# EAGLE board breakout (EAGLE 9.5.1), part 1 of 2
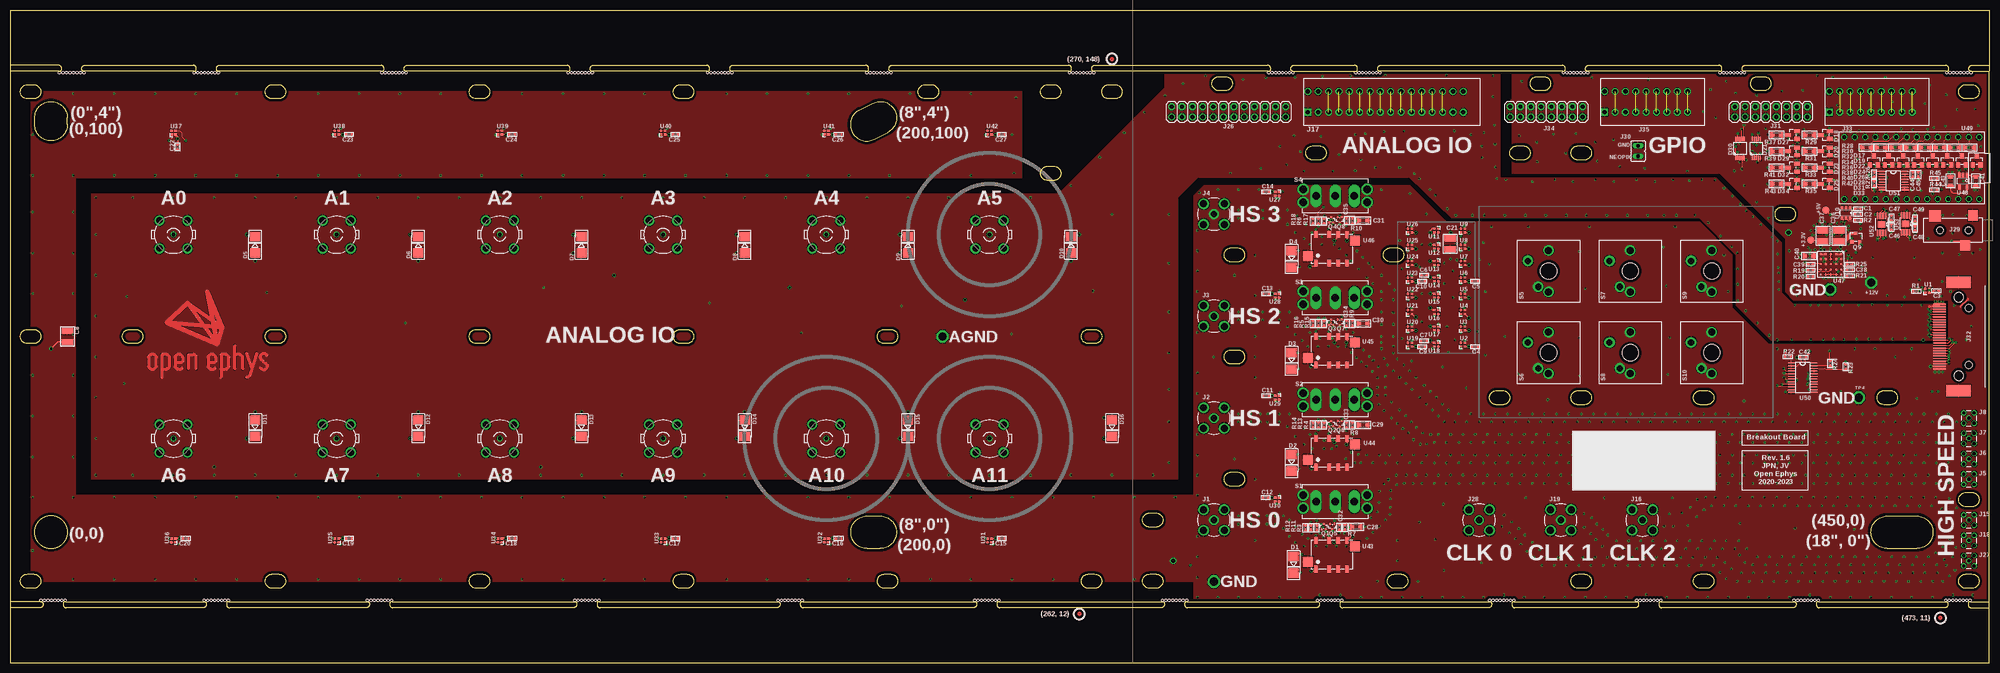
[diagram p0: board, top side]
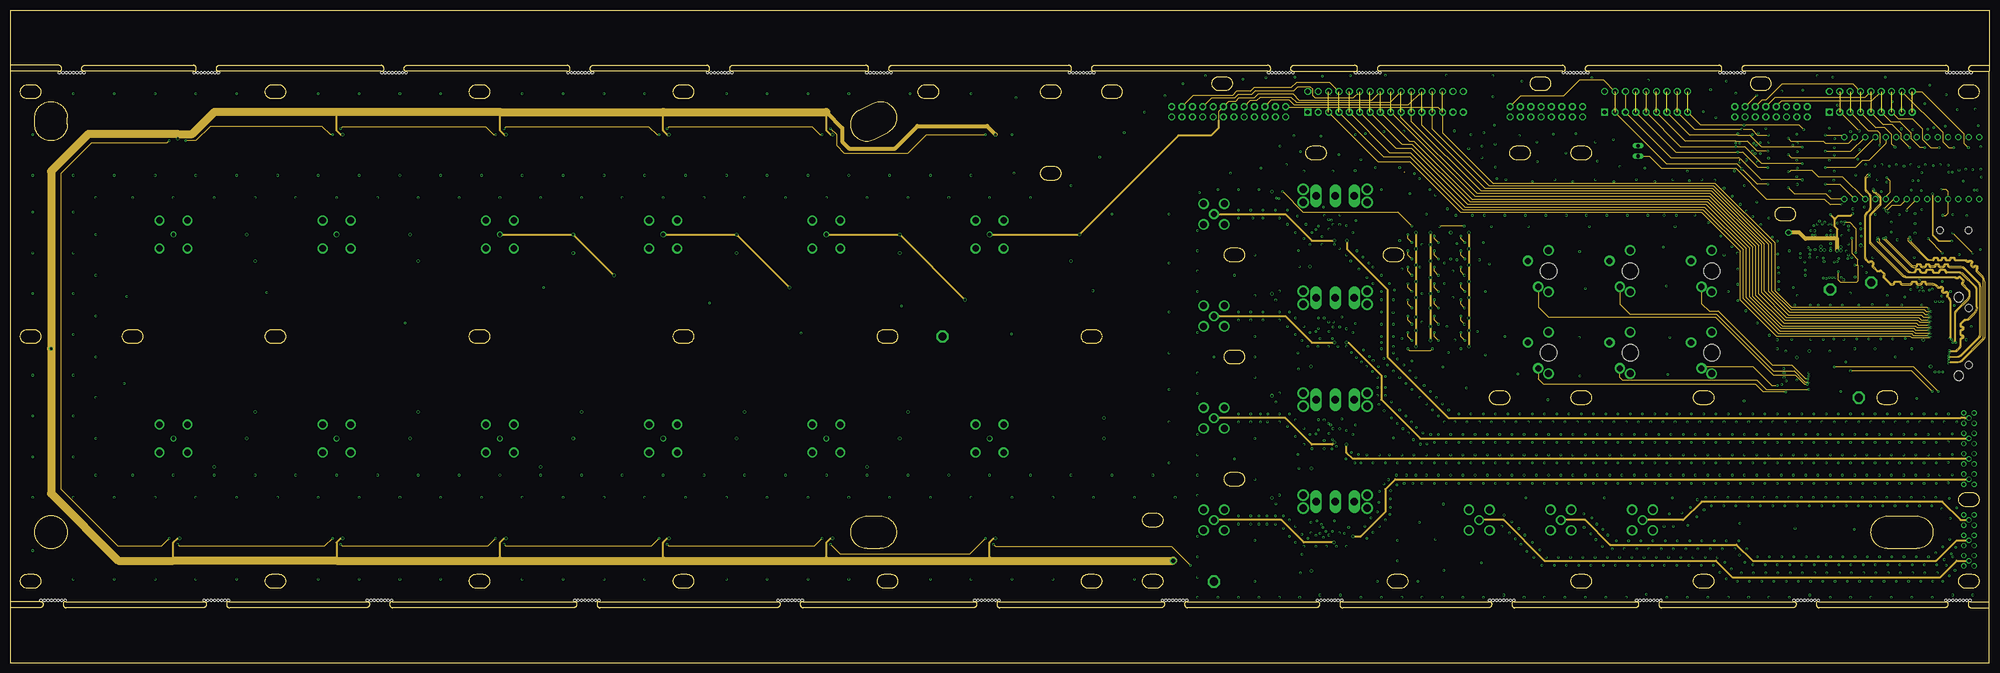
[diagram p1: board, inner layer HighSpeed]
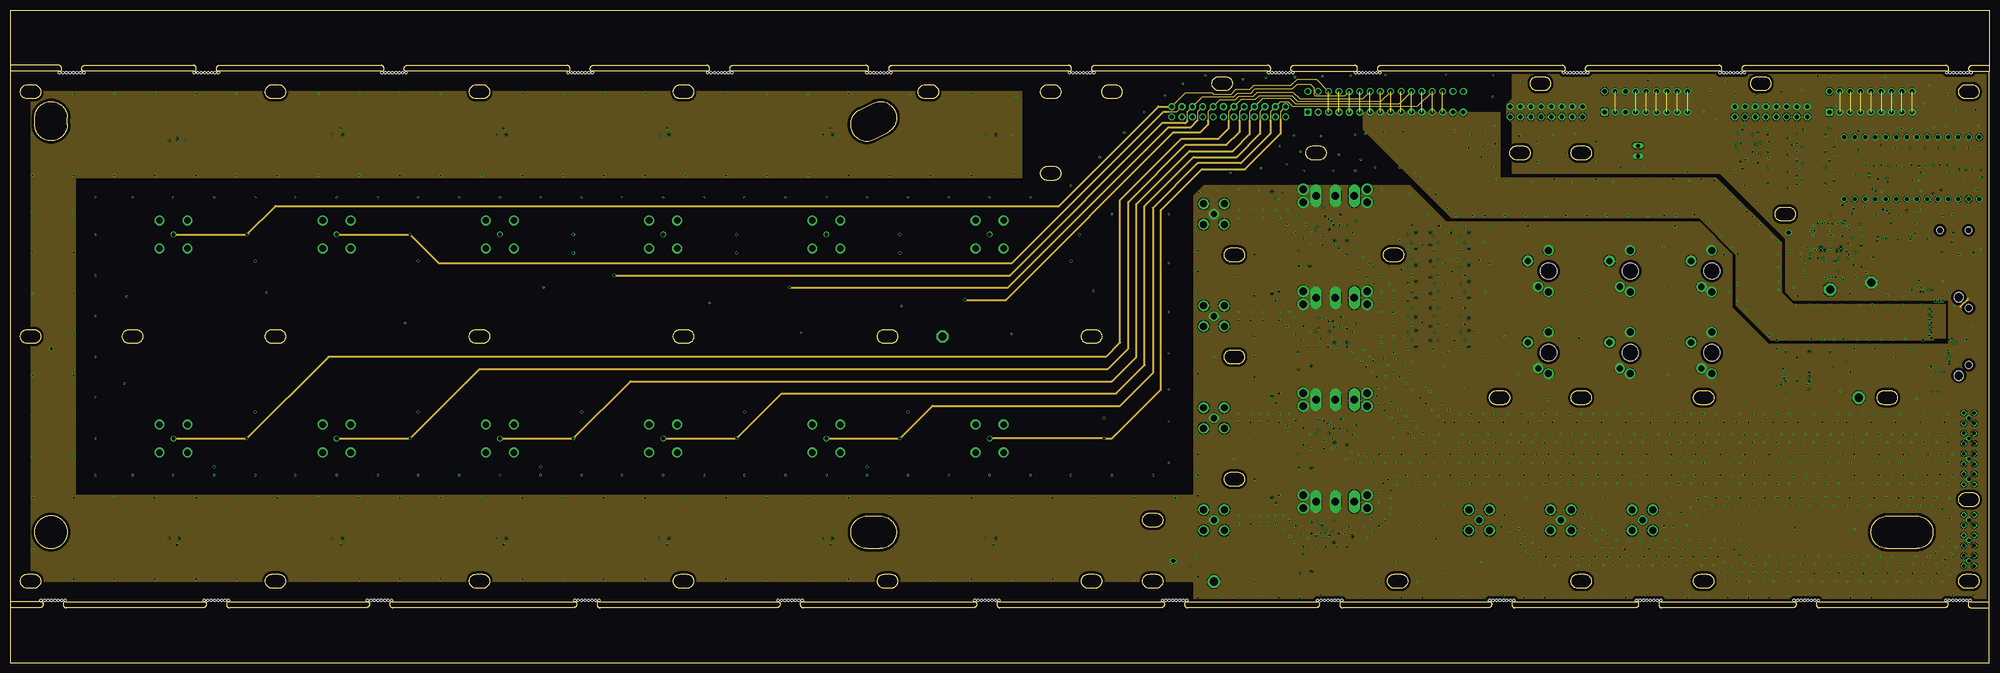
[diagram p2: board, inner layer GND2]
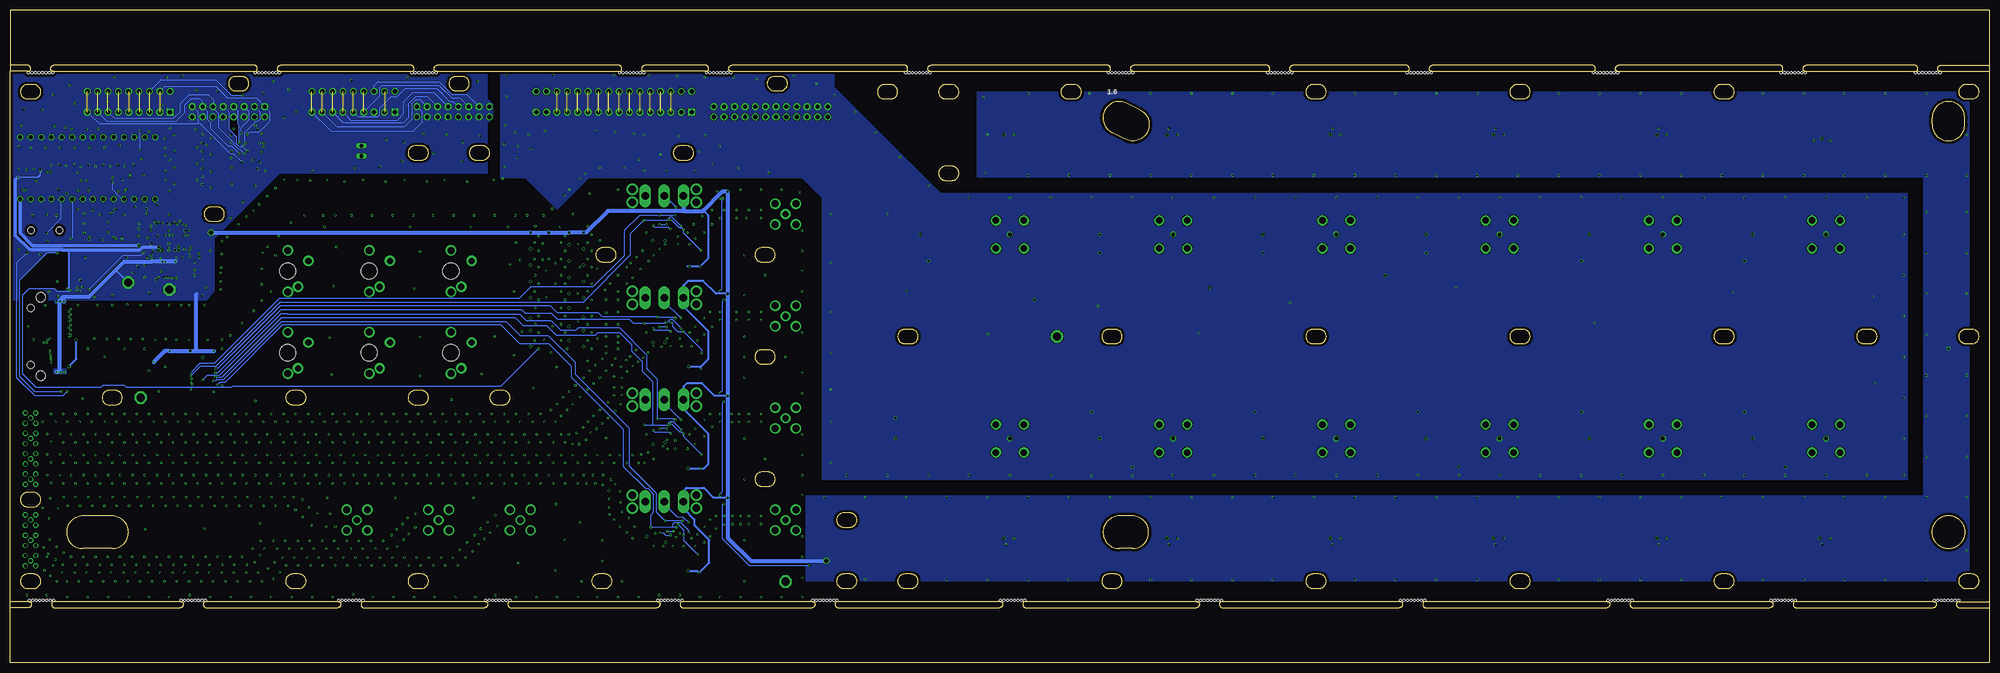
[diagram p3: board, bottom side, seen from below]

Size 485 x 160 mm. Coordinates in mm from the lower left corner, seen from the top.
Outline: 488 segments
Outline: circle at 10,32 radius 4
Copper layers (1+2*3+16): GND1 0.035mm / dielectric 0.2mm / HighSpeed 0.0175mm / dielectric 1.065mm / GND2 0.0356mm / dielectric 0.2007mm / LowSpeed 0.035mm
Design rules "jlcpcb-4-layer_JLC7628-stackup *": minimum track width 0.19mm, minimum drill 0.2mm, track to track 3.5mil, track to pad 0.1mm, pad to pad 0.1mm, via to via 0.1mm, smd to smd 0mil, copper to edge 0.7mm, drill to drill 5mil, minimum pad ring 4mil, minimum via ring 4mil, stop-mask expansion 3mil, vias tented up to drill 100mil, thermal gap 10mil
Net classes: 1 stripline: width 0.48 mm, drill 0.5 mm, clearance 0.1 mm; 3 100 Ohm Diff Mid: width 0.19 mm, drill 0.3 mm, clearance 0.09 mm
Holes 0.6 mm at 475.4,144.7 476.25,144.7 477.1,144.7 477.95,144.7 478.8,144.7 479.65,144.7 474.55,144.7 480.5,144.7 419.85,144.7 420.7,144.7 421.55,144.7 422.4,144.7 423.25,144.7 424.1,144.7 419,144.7 424.95,144.7 381.45,144.7 382.3,144.7 383.15,144.7 384,144.7 384.85,144.7 385.7,144.7 380.6,144.7 386.55,144.7 330.55,144.7 331.4,144.7 332.25,144.7 333.1,144.7 333.95,144.7 334.8,144.7 329.7,144.7 335.65,144.7 309.25,144.7 310.1,144.7 310.95,144.7 311.8,144.7 312.65,144.7 313.5,144.7 308.4,144.7 314.35,144.7 260.45,144.7 261.3,144.7 262.15,144.7 263,144.7 263.85,144.7 264.7,144.7 259.6,144.7 265.55,144.7 210.75,144.7 211.6,144.7 212.45,144.7 213.3,144.7 214.15,144.7 215,144.7 209.9,144.7 215.85,144.7 171.75,144.7 172.6,144.7 173.45,144.7 174.3,144.7 175.15,144.7 176,144.7 170.9,144.7 176.85,144.7 137.55,144.7 138.4,144.7 139.25,144.7 140.1,144.7 140.95,144.7 141.8,144.7 136.7,144.7 142.65,144.7 91.95,144.7 92.8,144.7 93.65,144.7 94.5,144.7 95.35,144.7 96.2,144.7 91.1,144.7 97.05,144.7 45.95,144.7 46.8,144.7 47.65,144.7 48.5,144.7 49.35,144.7 50.2,144.7 45.1,144.7 51.05,144.7 12.95,144.7 13.8,144.7 14.65,144.7 15.5,144.7 16.35,144.7 17.2,144.7 12.1,144.7 18.05,144.7 12.65,15.3 11.8,15.3 10.95,15.3 10.1,15.3 9.25,15.3 8.4,15.3 13.5,15.3 7.55,15.3 52.65,15.3 51.8,15.3 50.95,15.3 50.1,15.3 49.25,15.3 48.4,15.3 53.5,15.3 47.55,15.3 92.65,15.3 91.8,15.3 90.95,15.3 90.1,15.3 89.25,15.3 88.4,15.3 93.5,15.3 87.55,15.3 143.45,15.3 142.6,15.3 141.75,15.3 140.9,15.3 140.05,15.3 139.2,15.3 144.3,15.3 138.35,15.3 193.25,15.3 192.4,15.3 191.55,15.3 190.7,15.3 189.85,15.3 189,15.3 194.1,15.3 188.15,15.3 241.45,15.3 240.6,15.3 239.75,15.3 238.9,15.3 238.05,15.3 237.2,15.3 242.3,15.3 236.35,15.3 287.45,15.3 286.6,15.3 285.75,15.3 284.9,15.3 284.05,15.3 283.2,15.3 288.3,15.3 282.35,15.3 325.45,15.3 324.6,15.3 323.75,15.3 322.9,15.3 322.05,15.3 321.2,15.3 326.3,15.3 320.35,15.3 367.65,15.3 366.8,15.3 365.95,15.3 365.1,15.3 364.25,15.3 363.4,15.3 368.5,15.3 362.55,15.3 403.65,15.3 402.8,15.3 401.95,15.3 401.1,15.3 400.25,15.3 399.4,15.3 404.5,15.3 398.55,15.3 479.45,15.3 478.6,15.3 477.75,15.3 476.9,15.3 476.05,15.3 475.2,15.3 480.3,15.3 474.35,15.3 442.25,15.3 441.4,15.3 440.55,15.3 439.7,15.3 438.85,15.3 438,15.3 443.1,15.3 437.15,15.3
tKeepout: area 398.9,121 to 414.9,129

## Footprints (pad centres in the part's own frame; a part is rotated, then mirrored left to right if it is on the bottom)
0402 = smd 0.686 x 0.762: 1 -0.533,0; 2 0.533,0
1210 = smd 1.651 x 2.794: 1 -1.397,0; 2 1.397,0
0805 = smd 0.965 x 1.524: 1 -1.041,0; 2 1.041,0
SMA-DO214AC = smd 2.3 x 2.5: A -2,0; C 2,0
SOT23 = smd 1 x 1.4: 1 -0.95,-1.1; 2 0.95,-1.1; 3 0,1.1
MSOP-10-3X3 = smd 1.1 x 0.29: 1 -2.35,1; 2 -2.35,0.5; 3 -2.35,0; 4 -2.35,-0.5; 5 -2.35,-1; 6 2.35,-1; 7 2.35,-0.5; 8 2.35,0; 9 2.35,0.5; 10 2.35,1
SMA_JACK_142-0701-201 = drill 1.575: CLK 0,0 | drill 1.702: GND$1 -2.54,2.54; GND$2 2.54,2.54; GND$3 -2.54,-2.54; GND$4 2.54,-2.54
MMCX-THRU = drill 0.8: GND@1 -1.27,1.27; GND@2 -1.27,-1.27; GND@3 1.27,-1.27; GND@4 1.27,1.27; SIG 0,0
0731010360 = drill 0.9: 1 0,0 | drill 1.6: 2 3.43,3.43; 3 -3.43,3.43; 4 -3.43,-3.43; 5 3.43,-3.43
SCREW16-2 = drill 1.1 square: 1 0,0 | drill 1.1 octagon: 2 2.54,0; 3 5.08,0; 4 7.62,0; 5 10.16,0; 6 12.7,0; 7 15.24,0; 8 17.78,0; 9 20.32,0; 10 22.86,0; 11 25.4,0; 12 27.94,0; 13 30.48,0; 14 33.02,0; 15 35.56,0; 16 38.1,0; 17 0,5.08; 18 2.54,5.08; 19 5.08,5.08; 20 7.62,5.08; 21 10.16,5.08; 22 12.7,5.08; 23 15.24,5.08; 24 17.78,5.08; 25 20.32,5.08; 26 22.86,5.08; 27 25.4,5.08; 28 27.94,5.08; 29 30.48,5.08; 30 33.02,5.08; 31 35.56,5.08; 32 38.1,5.08
2X12-BIG = drill 1.016 pad 1.676 octagon: 1 -13.97,-1.17; 2 -13.97,1.37; 3 -11.43,-1.17; 4 -11.43,1.37; 5 -8.89,-1.17; 6 -8.89,1.37; 7 -6.35,-1.17; 8 -6.35,1.37; 9 -3.81,-1.17; 10 -3.81,1.37; 11 -1.27,-1.17; 12 -1.27,1.37; 13 1.27,-1.17; 14 1.27,1.37; 15 3.81,-1.17; 16 3.81,1.37; 17 6.35,-1.17; 18 6.35,1.37; 19 8.89,-1.17; 20 8.89,1.37; 21 11.43,-1.17; 22 11.43,1.37; 23 13.97,-1.17; 24 13.97,1.37
35RASMT2BHNTRX = smd 2.4 x 2.55: 1 0.8,3.675; 5 -1.1,-3.675 | smd 2.9 x 2.75: 4 8.2,-3.575 | hole 1.6: 0,0; 7,0
JP2 = drill 0.914 long: 1 0,0; 2 2.54,0
2X08-BIG = drill 1.016 pad 1.676 octagon: 1 -8.89,-1.17; 2 -8.89,1.37; 3 -6.35,-1.17; 4 -6.35,1.37; 5 -3.81,-1.17; 6 -3.81,1.37; 7 -1.27,-1.17; 8 -1.27,1.37; 9 1.27,-1.17; 10 1.27,1.37; 11 3.81,-1.17; 12 3.81,1.37; 13 6.35,-1.17; 14 6.35,1.37; 15 8.89,-1.17; 16 8.89,1.37
12226-82X0-00XX = smd 0.335 x 3: 1 7.938,7.2; 2 6.668,7.2; 3 5.397,7.2; 4 4.128,7.2; 5 2.857,7.2; 6 1.587,7.2; 7 0.318,7.2; 8 -0.953,7.2; 9 -2.223,7.2; 10 -3.493,7.2; 11 -4.763,7.2; 12 -6.032,7.2; 13 -7.303,7.2; 14 7.303,7.2; 15 6.032,7.2; 16 4.763,7.2; 17 3.493,7.2; 18 2.223,7.2; 19 0.953,7.2; 20 -0.318,7.2; 21 -1.587,7.2; 22 -2.857,7.2; 23 -4.128,7.2; 24 -5.397,7.2; 25 -6.668,7.2; 26 -7.938,7.2 | smd 2.8 x 6: PAD1 -13.3,2.5; PAD2 13.3,2.5 | hole 1.8: 7,0; -7,0 | hole 2.3: 9.6,2.5; -9.6,2.5
SCREW9-2 = drill 1.1 square: 1 0,0 | drill 1.1 octagon: 2 2.54,0; 3 5.08,0; 4 7.62,0; 5 10.16,0; 6 12.7,0; 7 15.24,0; 8 17.78,0; 9 20.32,0; 10 0,5.08; 11 2.54,5.08; 12 5.08,5.08; 13 7.62,5.08; 14 10.16,5.08; 15 12.7,5.08; 16 15.24,5.08; 17 17.78,5.08; 18 20.32,5.08
SC75 = smd 0.356 x 0.503: 1 -0.508,-0.65; 2 0.508,-0.65; 3 0,0.65
SOT23-GSD = smd 0.8 x 0.9: D 0,0; G -0.95,-2.1; S 0.95,-2.1
CK_7101J1V3QE2 = drill 1.85 long: 1 0,0 | drill 1.85 pad 2.54 long: 2 0,4.7; 3 0,-4.7 | drill 1.85: P$4 -1.59,7.875; P$5 1.59,7.875; P$6 -1.59,-7.875; P$7 1.59,-7.875
CHERRY-MX = drill 1.714 pad 1.93: P$3 -5.08,0; P$4 5.08,0 | drill 1.5 pad 2.54: SW1 -3.81,2.54; SW2 2.54,5.08 | hole 4: 0,0
TP19R = smd 1.9 x 1.9: TP 0,0
TESTPOINT_2MM = drill 2 octagon: 1 0,0
NEOPIXEL-1.5X1.5 = smd 0.55 x 0.55: 1 -0.475,-0.475; 2 0.475,-0.475; 3 0.475,0.475; 4 -0.475,0.475
SOT23-6 = smd 0.65 x 1.06: 1 -0.95,-1.1; 2 0,-1.1; 3 0.95,-1.1; 4 0.95,1.1; 5 0,1.1; 6 -0.95,1.1
G6KU-2F-RF = smd 0.8 x 1.8: 1 0,-3.5; 1X6 5.4,3.5; 2 3.2,-3.5; 3 5.4,-3.5; 4 7.6,-3.5; 5 7.6,3.5; 6 3.2,3.5; 7 0,3.5 | smd 2.5 x 2.5: CASE1 -1.95,-1.75; CASE2 9.55,2.05
BGA_5X5_625X625 = smd 0.635 x 0.635: A1 -2.54,2.54; A2 -1.27,2.54; A3 0,2.54; A4 1.27,2.54; A5 2.54,2.54; B1 -2.54,1.27; B2 -1.27,1.27; B3 0,1.27; B4 1.27,1.27; B5 2.54,1.27; C1 -2.54,0; C2 -1.27,0; C3 0,0; C4 1.27,0; C5 2.54,0; D1 -2.54,-1.27; D2 -1.27,-1.27; D3 0,-1.27; D4 1.27,-1.27; D5 2.54,-1.27; E1 -2.54,-2.54; E2 -1.27,-2.54; E3 0,-2.54; E4 1.27,-2.54; E5 2.54,-2.54
TSOT23-5 = smd 0.6 x 1.408: 1 -0.95,-1.404; 2 0,-1.404; 3 0.95,-1.404; 4 0.95,1.404; 5 -0.95,1.404
TINY-FPGA-BX_BASIC = drill 0.965: 1 -7.62,13.97; 2 -7.62,11.43; 3 -7.62,8.89; 3.3V 7.62,11.43; 4 -7.62,6.35; 5 -7.62,3.81; 6 -7.62,1.27; 7 -7.62,-1.27; 8 -7.62,-3.81; 9 -7.62,-6.35; 10 -7.62,-8.89; 11 -7.62,-11.43; 12 -7.62,-13.97; 13 -7.62,-16.51; 14 7.62,-16.51; 15 7.62,-13.97; 16 7.62,-11.43; 17 7.62,-8.89; 18 7.62,-6.35; 19 7.62,-3.81; 20 7.62,-1.27; 21 7.62,1.27; 22 7.62,3.81; 23 7.62,6.35; 24 7.62,8.89; GND@1 -7.62,16.51; GND@2 7.62,13.97; VIN 7.62,16.51
TSSOP-24 = smd 1.6 x 0.3: 1 -2.8,3.575; 2 -2.8,2.925; 3 -2.8,2.275; 4 -2.8,1.625; 5 -2.8,0.975; 6 -2.8,0.325; 7 -2.8,-0.325; 8 -2.8,-0.975; 9 -2.8,-1.625; 10 -2.8,-2.275; 11 -2.8,-2.925; 12 -2.8,-3.575; 13 2.8,-3.575; 14 2.8,-2.925; 15 2.8,-2.275; 16 2.8,-1.625; 17 2.8,-0.975; 18 2.8,-0.325; 19 2.8,0.325; 20 2.8,0.975; 21 2.8,1.625; 22 2.8,2.275; 23 2.8,2.925; 24 2.8,3.575
TSSOP-16 = smd 1.6 x 0.3: 1 -2.8,2.275; 2 -2.8,1.625; 3 -2.8,0.975; 4 -2.8,0.325; 5 -2.8,-0.325; 6 -2.8,-0.975; 7 -2.8,-1.625; 8 -2.8,-2.275; 9 2.8,-2.275; 10 2.8,-1.625; 11 2.8,-0.975; 12 2.8,-0.325; 13 2.8,0.325; 14 2.8,0.975; 15 2.8,1.625; 16 2.8,2.275
MSOP-8-PAD-3X3 = smd 1.6 x 0.4: 1 -2.1,0.975; 2 -2.1,0.325; 3 -2.1,-0.325; 4 -2.1,-0.975; 5 2.1,-0.975; 6 2.1,-0.325; 7 2.1,0.325; 8 2.1,0.975 | smd 1.57 x 1.89: PAD 0,0

## Placement (x,y rotation side)
C1  0.1uF  [0402]  452.8,111.3 0 top
C2  0.1uF  [0402]  452.8,109.9 0 top
C3  0.1uF  [0402]  472,91.2 180 top
C4  0.1uF  [0402]  359,77.5 180 top
C5  0.1uF  [0402]  359,93.5 180 top
C6  0.1uF  [0402]  346.5,95 0 top
C7  0.1uF  [0402]  346.5,79 0 top
C8  47uF  [1210]  14,80 270 top
C9  0.1uF  [0402]  346,77.5 180 top
C10  0.1uF  [0402]  346,93.5 180 top
C11  0.1uF  [0402]  307.8,65.5 0 top
C12  0.1uF  [0402]  307.7,40.5 0 top
C13  0.1uF  [0402]  307.8,90.5 0 top
C14  0.1uF  [0402]  307.8,115.5 0 top
C15  0.1uF  [0402]  243,30.5 180 top
C16  0.1uF  [0402]  203,30.5 180 top
C17  0.1uF  [0402]  163,30.5 180 top
C18  0.1uF  [0402]  123,30.5 180 top
C19  0.1uF  [0402]  83,30.5 180 top
C20  0.1uF  [0402]  43,30.5 180 top
C21  47uF  [1210]  352.9,102.7 90 top
C22  0.1uF  [0402]  41,126.5 90 top
C23  0.1uF  [0402]  83,129.5 180 top
C24  0.1uF  [0402]  123,129.5 180 top
C25  0.1uF  [0402]  163,129.5 180 top
C26  0.1uF  [0402]  203,129.5 180 top
C27  0.1uF  [0402]  243,129.5 180 top
C28  10uF  [0805]  329.8,33.3 180 top
C29  10uF  [0805]  331.6,58.3 180 top
C30  10uF  [0805]  331.6,83.2 180 top
C31  10uF  [0805]  331.6,108.4 180 top
C32  47nF  [0402]  325.7,33.2 270 top
C33  47nF  [0402]  327.5,58.3 270 top
C34  47nF  [0402]  327.5,83.2 270 top
C35  47nF  [0402]  327.5,108.4 270 top
C36  47uF  [1210]  448.2,104.7 270 top
C37  47uF  [1210]  444.2,104.7 270 top
C38  0.1uF  [0402]  450.8,96.3 180 top
C39  0.1uF  [0402]  441.2,97.7 0 top
C40  10uF  [0805]  440.8,99.7 0 top
C41  10uF  [0805]  481.7,118.1 270 top
C42  0.1uF  [0402]  439.4,74.9 0 top
C43  10uF  [0805]  475.5,118.1 90 top
C44  4.7nF  [0402]  466.2,119.7 270 top
C45  0.1uF  [0402]  467.6,119.7 270 top
C46  4.7nF  [0402]  461,106.8 270 top
C47  0.1uF  [0402]  461,109.1 90 top
C48  4.7nF  [0402]  466.8,106.5 270 top
C49  0.1uF  [0402]  466.8,108.8 90 top
D1  S1GTR  [SMA-DO214AC]  314.5,24 270 top
D2  S1GTR  [SMA-DO214AC]  314,49 270 top
D3  S1GTR  [SMA-DO214AC]  314,74 270 top
D4  S1GTR  [SMA-DO214AC]  314,99 270 top
D5  P6SMB18CA  [SMA-DO214AC]  60,102.5 90 top
D6  P6SMB18CA  [SMA-DO214AC]  100,102.5 90 top
D7  P6SMB18CA  [SMA-DO214AC]  140,102.5 90 top
D8  P6SMB18CA  [SMA-DO214AC]  180,102.5 90 top
D9  P6SMB18CA  [SMA-DO214AC]  220,102.5 90 top
D10  P6SMB18CA  [SMA-DO214AC]  260,102.5 90 top
D11  P6SMB18CA  [SMA-DO214AC]  60,57.5 270 top
D12  P6SMB18CA  [SMA-DO214AC]  100,57.5 270 top
D13  P6SMB18CA  [SMA-DO214AC]  140,57.5 270 top
D14  P6SMB18CA  [SMA-DO214AC]  180,57.5 270 top
D15  P6SMB18CA  [SMA-DO214AC]  220,57.5 270 top
D16  P6SMB18CA  [SMA-DO214AC]  270,57.5 270 top
D17  BAT54SLT1G  [SOT23]  456.7,123.2 0 top
D18  BAT54SLT1G  [SOT23]  444.8,129.4 90 top
D19  BAT54SLT1G  [SOT23]  460.3,123.2 0 top
D20  BAT54SLT1G  [SOT23]  444.8,125.4 90 top
D21  CM1213−08MR  [MSOP-10-3X3]  427.9,126.1 90 top
D22  BAT54SLT1G  [SOT23]  463.9,123.2 0 top
D23  BAT54SLT1G  [SOT23]  444.8,121.4 90 top
D24  BAT54SLT1G  [SOT23]  467.5,123.2 0 top
D25  BAT54SLT1G  [SOT23]  444.8,117.4 90 top
D26  BAT54SLT1G  [SOT23]  471.1,123.2 0 top
D27  BAT54SLT1G  [SOT23]  436.8,129.4 90 top
D28  BAT54SLT1G  [SOT23]  474.7,123.2 0 top
D29  BAT54SLT1G  [SOT23]  436.8,125.4 90 top
D30  CM1213−08MR  [MSOP-10-3X3]  423.9,126.1 90 top
D31  BAT54SLT1G  [SOT23]  478.3,123.2 0 top
D32  BAT54SLT1G  [SOT23]  436.8,121.4 90 top
D33  BAT54SLT1G  [SOT23]  481.9,123.2 0 top
D34  BAT54SLT1G  [SOT23]  436.8,117.4 90 top
E$1  [FIDUCIAL]  473,11 0 top
E$3  [FIDUCIAL]  262,12 0 top
E$5  [FIDUCIAL]  270,148 0 top
J1  [SMA_JACK_142-0701-201]  295,35 0 top
J2  [SMA_JACK_142-0701-201]  295,60 0 top
J3  [SMA_JACK_142-0701-201]  295,85 0 top
J4  [SMA_JACK_142-0701-201]  295,110 0 top
J5  [MMCX-THRU]  480,45 0 top
J6  [MMCX-THRU]  480,50 0 top
J7  [MMCX-THRU]  480,55 0 top
J8  [MMCX-THRU]  480,60 0 top
J9  [0731010360]  40,105 0 top
J10  [0731010360]  80,105 0 top
J11  [0731010360]  120,105 0 top
J12  [0731010360]  160,105 0 top
J13  [0731010360]  200,105 0 top
J14  [0731010360]  240,105 0 top
J15  [MMCX-THRU]  480,35 0 top
J16  [SMA_JACK_142-0701-201]  400,35 0 top
J17  1789074  [SCREW16-2]  318,135 0 top
J18  [MMCX-THRU]  480,30 0 top
J19  [SMA_JACK_142-0701-201]  380,35 0 top
J20  [0731010360]  40,55 0 top
J21  [0731010360]  80,55 0 top
J22  [0731010360]  120,55 0 top
J23  [0731010360]  160,55 0 top
J24  [0731010360]  200,55 0 top
J25  [0731010360]  240,55 0 top
J26  69168-124HLF  [2X12-BIG]  298.6,135 0 top
J27  [MMCX-THRU]  480,25 0 top
J28  [SMA_JACK_142-0701-201]  360,35 0 top
J29  SJ1-3514-SMT-TR  [35RASMT2BHNTRX]  479.9,106 180 top
J30  [JP2]  398.9,124.2 90 top
J31  69168-116HLF  [2X08-BIG]  431.5,135 0 top
J32  12226-8250-00FR  [12226-82X0-00XX]  480,80 90 top
J33  1888276  [SCREW9-2]  445.8,135 0 top
J34  69168-116HLF  [2X08-BIG]  376.45,135 0 top
J35  1888276  [SCREW9-2]  390.75,135 0 top
Q1  SI1012R  [SC75]  321.9,33.4 0 top
Q2  SI1012R  [SC75]  323.7,58.6 0 top
Q3  SI1012R  [SC75]  323.7,83.5 0 top
Q4  SI1012R  [SC75]  323.7,108.6 0 top
Q5  SI1012R  [SC75]  324,33.4 180 top
Q6  SI1012R  [SC75]  325.8,58.6 180 top
Q7  SI1012R  [SC75]  325.8,83.5 180 top
Q8  SI1012R  [SC75]  325.8,108.6 180 top
Q9  IRFML8244TRPBF  [SOT23-GSD]  452.3,105.3 0 top
R1  500  [0402]  467.1,91.1 0 top
R2  4.7k  [0402]  452.8,108.5 180 top
R3  1k  [0402]  318.8,33.1 270 top
R4  1k  [0402]  320.6,58.3 90 top
R5  1k  [0402]  320.6,83.2 90 top
R6  1k  [0402]  320.6,108.3 90 top
R7  49.9  [0402]  327.1,33.2 270 top
R8  49.9  [0402]  328.9,58.3 270 top
R9  49.9  [0402]  328.9,83.2 270 top
R10  49.9  [0402]  328.9,108.4 270 top
R11  1k  [0402]  320.2,33.1 90 top
R12  100k  [0402]  317.4,33.1 90 top
R13  1k  [0402]  322,58.3 90 top
R14  100k  [0402]  319.2,58.3 90 top
R15  1k  [0402]  322,83.2 90 top
R16  100k  [0402]  319.2,83.2 90 top
R17  1k  [0402]  322,108.3 90 top
R18  100k  [0402]  319.2,108.3 90 top
R19  13.3k  [0402]  441.2,96.2 180 top
R20  649k  [0402]  441.2,94.7 180 top
R21  8.25k  [0402]  450.8,94.9 0 top
R22  4.7k  [0402]  435.6,75 0 top
R23  4.7k  [0402]  449.8,72.6 270 top
R24  4.7k  [0402]  446,73.4 270 top
R25  4.7k  [0402]  450.8,97.7 180 top
R26  100  [0402]  456.8,119.8 270 top
R27  100  [0402]  456.8,117.5 90 top
R28  270, 0.5W  [0805]  454.9,126.3 180 top
R29  270, 0.5W  [0805]  440.9,129.4 180 top
R30  270, 0.5W  [0805]  458.5,126.3 180 top
R31  270, 0.5W  [0805]  440.9,125.4 180 top
R32  270, 0.5W  [0805]  462.1,126.3 180 top
R33  270, 0.5W  [0805]  440.9,121.4 180 top
R34  270, 0.5W  [0805]  465.7,126.3 180 top
R35  270, 0.5W  [0805]  440.9,117.4 180 top
R36  270, 0.5W  [0805]  469.3,126.3 180 top
R37  270, 0.5W  [0805]  432.9,129.4 180 top
R38  270, 0.5W  [0805]  472.9,126.3 180 top
R39  270, 0.5W  [0805]  432.9,125.4 180 top
R40  270, 0.5W  [0805]  476.5,126.3 180 top
R41  270, 0.5W  [0805]  432.9,121.4 180 top
R42  270, 0.5W  [0805]  480.1,126.3 180 top
R43  270, 0.5W  [0805]  432.9,117.4 180 top
R44  13.3k  [0402]  471.5,116 0 top
R45  10R  [0402]  471.5,118.8 180 top
S1  7101J1V3BE2  [CK_7101J1V3QE2]  324.7,39.5 270 top
S2  7101J1V3BE2  [CK_7101J1V3QE2]  324.7,64.5 270 top
S3  7101J1V3BE2  [CK_7101J1V3QE2]  324.7,89.5 270 top
S4  7101J1V3BE2  [CK_7101J1V3QE2]  324.7,114.5 270 top
S5  CHERRY-MX  [CHERRY-MX]  377,96 90 top
S6  CHERRY-MX  [CHERRY-MX]  377,76 90 top
S7  CHERRY-MX  [CHERRY-MX]  397,96 90 top
S8  CHERRY-MX  [CHERRY-MX]  397,76 90 top
S9  CHERRY-MX  [CHERRY-MX]  417,96 90 top
S10  CHERRY-MX  [CHERRY-MX]  417,76 90 top
TP1  [TP19R]  441.2,103.6 270 top
TP2  [TP19R]  444.9,111 270 top
TP3  [TESTPOINT_2MM]  446,91.5 0 top
TP4  [TESTPOINT_2MM]  453,65 0 top
TP5  [TESTPOINT_2MM]  295,19.9 0 top
TP6  [TESTPOINT_2MM]  228.5,80 0 top
TP7  [TESTPOINT_2MM]  456.1,93.2 0 top
U1  SK6805-E-J  [NEOPIXEL-1.5X1.5]  469.8,91.2 0 top
U2  SK6805-E-J  [NEOPIXEL-1.5X1.5]  356,78 0 top
U3  SK6805-E-J  [NEOPIXEL-1.5X1.5]  356,82 0 top
U4  SK6805-E-J  [NEOPIXEL-1.5X1.5]  356,86 0 top
U5  SK6805-E-J  [NEOPIXEL-1.5X1.5]  356,90 0 top
U6  SK6805-E-J  [NEOPIXEL-1.5X1.5]  356,94 0 top
U7  SK6805-E-J  [NEOPIXEL-1.5X1.5]  356,98 0 top
U8  SK6805-E-J  [NEOPIXEL-1.5X1.5]  356,102 0 top
U9  SK6805-E-J  [NEOPIXEL-1.5X1.5]  356,106 0 top
U10  TXB0101  [SOT23-6]  449.9,110.3 180 top
U11  SK6805-E-J  [NEOPIXEL-1.5X1.5]  349.5,106 180 top
U12  SK6805-E-J  [NEOPIXEL-1.5X1.5]  349.5,102 180 top
U13  SK6805-E-J  [NEOPIXEL-1.5X1.5]  349.5,98 180 top
U14  SK6805-E-J  [NEOPIXEL-1.5X1.5]  349.5,94 180 top
U15  SK6805-E-J  [NEOPIXEL-1.5X1.5]  349.5,90 180 top
U16  SK6805-E-J  [NEOPIXEL-1.5X1.5]  349.5,86 180 top
U17  SK6805-E-J  [NEOPIXEL-1.5X1.5]  349.5,82 180 top
U18  SK6805-E-J  [NEOPIXEL-1.5X1.5]  349.5,78 180 top
U19  SK6805-E-J  [NEOPIXEL-1.5X1.5]  343,78 0 top
U20  SK6805-E-J  [NEOPIXEL-1.5X1.5]  343,82 0 top
U21  SK6805-E-J  [NEOPIXEL-1.5X1.5]  343,86 0 top
U22  SK6805-E-J  [NEOPIXEL-1.5X1.5]  343,90 0 top
U23  SK6805-E-J  [NEOPIXEL-1.5X1.5]  343,94 0 top
U24  SK6805-E-J  [NEOPIXEL-1.5X1.5]  343,98 0 top
U25  SK6805-E-J  [NEOPIXEL-1.5X1.5]  343,102 0 top
U26  SK6805-E-J  [NEOPIXEL-1.5X1.5]  343,106 0 top
U27  SK6805-E-J  [NEOPIXEL-1.5X1.5]  310.5,115 180 top
U28  SK6805-E-J  [NEOPIXEL-1.5X1.5]  310.5,90 180 top
U29  SK6805-E-J  [NEOPIXEL-1.5X1.5]  310.5,65 180 top
U30  SK6805-E-J  [NEOPIXEL-1.5X1.5]  310.5,40 180 top
U31  SK6805-E-J  [NEOPIXEL-1.5X1.5]  240,30 90 top
U32  SK6805-E-J  [NEOPIXEL-1.5X1.5]  200,30 90 top
U33  SK6805-E-J  [NEOPIXEL-1.5X1.5]  160,30 90 top
U34  SK6805-E-J  [NEOPIXEL-1.5X1.5]  120,30 90 top
U35  SK6805-E-J  [NEOPIXEL-1.5X1.5]  80,30 90 top
U36  SK6805-E-J  [NEOPIXEL-1.5X1.5]  40,30 90 top
U37  SK6805-E-J  [NEOPIXEL-1.5X1.5]  40,130 0 top
U38  SK6805-E-J  [NEOPIXEL-1.5X1.5]  80,130 0 top
U39  SK6805-E-J  [NEOPIXEL-1.5X1.5]  120,130 0 top
U40  SK6805-E-J  [NEOPIXEL-1.5X1.5]  160,130 0 top
U41  SK6805-E-J  [NEOPIXEL-1.5X1.5]  200,130 0 top
U42  SK6805-E-J  [NEOPIXEL-1.5X1.5]  240,130 0 top
U43  G6K-2F-RF  [G6KU-2F-RF]  320,26.5 0 top
U44  G6K-2F-RF  [G6KU-2F-RF]  320,51.5 0 top
U45  G6K-2F-RF  [G6KU-2F-RF]  320,76.5 0 top
U46  G6K-2F-RF  [G6KU-2F-RF]  320,101.5 0 top
U47  LTM4622A  [BGA_5X5_625X625]  446.2,97.7 270 top
U48  LP5951MFX-3.3/NOPB  [TSOT23-5]  478.6,118.1 180 top
U49  TINY-FPGA-BX  [TINY-FPGA-BX_BASIC]  466,121.3 270 top
U50  TCA9555  [TSSOP-24]  439.3,69.9 0 top
U51  FIN1032MTCX  [TSSOP-16]  461.5,118.2 0 top
U52  SN65LVDS9638DGN  [MSOP-8-PAD-3X3]  458.6,107.5 270 top
U53  SN65LVDS9638DGN  [MSOP-8-PAD-3X3]  464.5,107.6 270 top
X  OE-LOGO_28X20  [OE-LOGO-28X20]  47.1,77.4 0 top

## Library data of the parts
C1-C27 C32-C39 C42 C44-C49 D1-D34 J1-J35 Q1-Q9 R1-R45 S1-S10 TP1-TP7 U1-U47 U49-U53 X = jonnew
C28-C31 C40 C41 C43 = jonnew; MN: TDK Corp.; PARTNO: C2012X5R1Cxxxxxxx; VID: DK
E$1 E$3 E$5 = fiducial
U48 = harp input expander; MPN: TLV70033DDCR; NOTES: -; TYPE: SMD

## Nets
!TCA_INT: R22.2 U50.1
+3V3: C1.1 C37.2 C42.2 C44.1 C45.1 C46.1 C47.1 C48.1 C49.1 D17.2 D18.2 D19.2 D20.2 D21.8 D22.2 D23.2 D24.2 D25.2 D26.2 D27.2 D28.2 D29.2 D30.8 D31.2 D32.2 D33.2 D34.2 R2.1 R22.1 R23.1 R24.1 TP1.TP U10.1 U47.D1 U47.E1 U50.24 U51.4 U51.16 U52.1 U53.1
+5V0: C2.1 C3.2 C4.2 C5.2 C6.2 C7.2 C8.2 C9.2 C10.2 C11.2 C12.2 C13.2 C14.2 C15.2 C16.2 C17.2 C18.2 C19.2 C20.2 C21.2 C22.2 C23.2 C24.2 C25.2 C26.2 C27.2 C36.2 C41.1 D1.C D2.C D3.C D4.C Q9.D S1.3 S2.3 S3.3 S4.3 TP2.TP U1.2 U2.2 U3.2 U4.2 U5.2 U6.2 U7.2 U8.2 U9.2 U10.6 U11.2 U12.2 U13.2 U14.2 U15.2 U16.2 U17.2 U18.2 U19.2 U20.2 U21.2 U22.2 U23.2 U24.2 U25.2 U26.2 U27.2 U28.2 U29.2 U30.2 U31.2 U32.2 U33.2 U34.2 U35.2 U36.2 U37.2 U38.2 U39.2 U40.2 U41.2 U42.2 U43.1 U44.1 U45.1 U46.1 U47.A1 U47.B1 U48.1 U48.3
+5V0_GOOD: Q9.G R25.1 U47.B4
+12V: C40.2 J32.1 J32.26 R25.2 TP7.1 U47.A2 U47.B2 U47.B3 U47.D2 U47.D3 U47.E2
AGND: D5.A D6.A D7.A D8.A D9.A D10.A D11.A D12.A D13.A D14.A D15.A D16.A J9.2 J9.3 J9.4 J9.5 J10.2 J10.3 J10.4 J10.5 J11.2 J11.3 J11.4 J11.5 J12.2 J12.3 J12.4 J12.5 J13.2 J13.3 J13.4 J13.5 J14.2 J14.3 J14.4 J14.5 J17.1 J17.2 J17.15 J17.16 J17.17 J17.18 J17.31 J17.32 J20.2 J20.3 J20.4 J20.5 J21.2 J21.3 J21.4 J21.5 J22.2 J22.3 J22.4 J22.5 J23.2 J23.3 J23.4 J23.5 J24.2 J24.3 J24.4 J24.5 J25.2 J25.3 J25.4 J25.5 J26.1 J26.3 J26.5 J26.7 J26.9 J26.11 J26.13 J26.15 J26.17 J26.19 J26.21 J26.23 J32.13 J32.14 TP6.1
AIO_0: D5.C J9.1 J17.3 J17.19 J26.2 J32.20
AIO_1: D6.C J10.1 J17.4 J17.20 J26.4 J32.7
AIO_2: D7.C J11.1 J17.5 J17.21 J26.6 J32.19
AIO_3: D8.C J12.1 J17.6 J17.22 J26.8 J32.6
AIO_4: D9.C J13.1 J17.7 J17.23 J26.10 J32.18
AIO_5: D10.C J14.1 J17.8 J17.24 J26.12 J32.5
AIO_6: D11.C J17.9 J17.25 J20.1 J26.14 J32.17
AIO_7: D12.C J17.10 J17.26 J21.1 J26.16 J32.4
AIO_8: D13.C J17.11 J17.27 J22.1 J26.18 J32.16
AIO_9: D14.C J17.12 J17.28 J23.1 J26.20 J32.3
AIO_10: D15.C J17.13 J17.29 J24.1 J26.22 J32.15
AIO_11: D16.C J17.14 J17.30 J25.1 J26.24 J32.2
BUTTON0: S5.SW1 U50.16
BUTTON1: S7.SW1 U50.17
BUTTON2: S9.SW1 U50.18
BUTTON3: S6.SW1 U50.11
BUTTON4: S8.SW1 U50.14
BUTTON5: S10.SW1 U50.10
DIN0: D30.4 J34.2 J35.2 J35.11 R43.2
DIN0_P: D34.3 R43.1 U49.14
DIN1: D30.3 J34.4 J35.3 J35.12 R35.2
DIN1_P: D25.3 R35.1 U49.15
DIN2: D30.2 J34.6 J35.4 J35.13 R41.2
DIN2_P: D32.3 R41.1 U49.16
DIN3: D30.1 J34.8 J35.5 J35.14 R33.2
DIN3_P: D23.3 R33.1 U49.9
DIN4: D30.10 J34.10 J35.6 J35.15 R39.2
DIN4_P: D29.3 R39.1 U49.10
DIN5: D30.9 J34.12 J35.7 J35.16 R31.2
DIN5_P: D20.3 R31.1 U49.11
DIN6: D30.7 J34.14 J35.8 J35.17 R37.2
DIN6_P: D27.3 R37.1 U49.12
DIN7: D30.6 J34.16 J35.9 J35.18 R29.2
DIN7_P: D18.3 R29.1 U49.13
DOUT0: D21.10 J31.2 J33.2 J33.11 R28.2
DOUT0_P: D17.3 R28.1 U49.8
DOUT1: D21.9 J31.4 J33.3 J33.12 R30.2
DOUT1_P: D19.3 R30.1 U49.7
DOUT2: D21.7 J31.6 J33.4 J33.13 R32.2
DOUT2_P: D22.3 R32.1 U49.6
DOUT3: D21.6 J31.8 J33.5 J33.14 R34.2
DOUT3_P: D24.3 R34.1 U49.5
DOUT4: D21.1 J31.10 J33.6 J33.15 R36.2
DOUT4_P: D26.3 R36.1 U49.4
DOUT5: D21.2 J31.12 J33.7 J33.16 R38.2
DOUT5_P: D28.3 R38.1 U49.3
DOUT6: D21.3 J31.14 J33.8 J33.17 R40.2
DOUT6_P: D31.3 R40.1 U49.2
DOUT7: D21.4 J31.16 J33.9 J33.18 R42.2
DOUT7_P: D33.3 R42.1 U49.1
GND: C1.2 C2.2 C3.1 C4.1 C5.1 C6.1 C7.1 C8.1 C9.1 C10.1 C11.1 C12.1 C13.1 C14.1 C15.1 C16.1 C17.1 C18.1 C19.1 C20.1 C21.1 C22.1 C23.1 C24.1 C25.1 C26.1 C27.1 C28.1 C29.1 C30.1 C31.1 C36.1 C37.1 C38.1 C39.1 C40.1 C41.2 C42.1 C43.2 C44.2 C45.2 C46.2 C47.2 C48.2 C49.2 D17.1 D18.1 D19.1 D20.1 D21.5 D22.1 D23.1 D24.1 D25.1 D26.1 D27.1 D28.1 D29.1 D30.5 D31.1 D32.1 D33.1 D34.1 J1.GND$1 J1.GND$2 J1.GND$3 J1.GND$4 J2.GND$1 J2.GND$2 J2.GND$3 J2.GND$4 J3.GND$1 J3.GND$2 J3.GND$3 J3.GND$4 J4.GND$1 J4.GND$2 J4.GND$3 J4.GND$4 J5.GND@1 J5.GND@2 J5.GND@3 J5.GND@4 J6.GND@1 J6.GND@2 J6.GND@3 J6.GND@4 J7.GND@1 J7.GND@2 J7.GND@3 J7.GND@4 J8.GND@1 J8.GND@2 J8.GND@3 J8.GND@4 J15.GND@1 J15.GND@2 J15.GND@3 J15.GND@4 J16.GND$1 J16.GND$2 J16.GND$3 J16.GND$4 J18.GND@1 J18.GND@2 J18.GND@3 J18.GND@4 J19.GND$1 J19.GND$2 J19.GND$3 J19.GND$4 J27.GND@1 J27.GND@2 J27.GND@3 J27.GND@4 J28.GND$1 J28.GND$2 J28.GND$3 J28.GND$4 J29.5 J30.2 J31.1 J31.3 J31.5 J31.7 J31.9 J31.11 J31.13 J31.15 J32.PAD1 J32.PAD2 J33.1 J33.10 J34.1 J34.3 J34.5 J34.7 J34.9 J34.11 J34.13 J34.15 J35.1 J35.10 Q5.2 Q6.2 Q7.2 Q8.2 R7.2 R8.2 R9.2 R10.2 R11.1 R12.1 R13.1 R14.1 R15.1 R16.1 R17.1 R18.1 R19.2 R20.2 R21.2 S1.2 S2.2 S3.2 S4.2 S5.SW2 S6.SW2 S7.SW2 S8.SW2 S9.SW2 S10.SW2 TP3.1 TP4.1 TP5.1 U1.4 U2.4 U3.4 U4.4 U5.4 U6.4 U7.4 U8.4 U9.4 U10.2 U11.4 U12.4 U13.4 U14.4 U15.4 U16.4 U17.4 U18.4 U19.4 U20.4 U21.4 U22.4 U23.4 U24.4 U25.4 U26.4 U27.4 U28.4 U29.4 U30.4 U31.4 U32.4 U33.4 U34.4 U35.4 U36.4 U37.4 U38.4 U39.4 U40.4 U41.4 U42.4 U43.CASE1 U43.CASE2 U44.CASE1 U44.CASE2 U45.CASE1 U45.CASE2 U46.CASE1 U46.CASE2 U47.B5 U47.C1 U47.C2 U47.C5 U47.D5 U48.2 U49.GND@1 U49.GND@2 U50.2 U50.3 U50.12 U50.21 U51.8 U51.9 U51.10 U51.12 U51.14 U51.15 U52.4 U52.PAD U53.3 U53.4 U53.PAD
HARP_CLKIN: J29.4 R44.2 U49.24
I2C_SCL: R23.2 U49.23 U50.22
I2C_SDA: R24.2 U49.22 U50.23
LOCKED: U9.3 U11.1
LVDS_DIN0_N [100 Ohm Diff Mid]: J32.23 U52.5
LVDS_DIN0_P [100 Ohm Diff Mid]: J32.10 U52.6
LVDS_DIN1_N [100 Ohm Diff Mid]: J32.11 U52.7
LVDS_DIN1_P [100 Ohm Diff Mid]: J32.24 U52.8
LVDS_DIN2_N [100 Ohm Diff Mid]: J32.25 U53.7
LVDS_DIN2_P [100 Ohm Diff Mid]: J32.12 U53.8
LVDS_DOUT0_N [100 Ohm Diff Mid]: J32.8 R26.1 U51.1
LVDS_DOUT0_P [100 Ohm Diff Mid]: J32.21 R26.2 U51.2
LVDS_DOUT1_N [100 Ohm Diff Mid]: J32.9 R27.1 U51.7
LVDS_DOUT1_P [100 Ohm Diff Mid]: J32.22 R27.2 U51.6
LVDS_IN_0: U49.18 U51.3
LVDS_IN_1: U49.17 U51.5
LVDS_OUT_0: U49.19 U52.3
LVDS_OUT_1: U49.20 U52.2
LVDS_OUT_2: U49.21 U53.2
N$1 [stripline]: J15.SIG J16.CLK
N$3 [stripline]: J18.SIG J19.CLK
N$4 [stripline]: J27.SIG J28.CLK
N$5: D1.A Q1.3 U43.7
N$6: Q1.2 Q5.3
N$7: U11.3 U12.1
N$8: U12.3 U13.1
N$9: U13.3 U14.1
N$10: U36.3 U37.1
N$11: U31.3 U32.1
N$12: D2.A Q2.3 U44.7
N$13: U15.3 U16.1
N$14: U16.3 U17.1
N$15: C32.2 U43.6
N$16: J29.1 R44.1 R45.2
N$19 [stripline]: J6.SIG U44.5
N$20: U17.3 U18.1
N$21: U1.3 U2.1
N$22: C33.1 R8.1
N$23: R3.1 S1.1
N$24: R21.1 U47.A4
N$25: R19.1 U47.E4
N$26: C38.2 U47.A3
N$27: C39.2 U47.E3
N$28 [stripline]: J5.SIG U43.5
N$29 [stripline]: J1.CLK U43.1X6
N$30: C32.1 R7.1
N$31: C33.2 U44.6
N$32: Q3.2 Q7.3
N$33: C34.1 R9.1
N$34 [stripline]: J2.CLK U44.1X6
N$35: R4.2 S2.1
N$36: C34.2 U45.6
N$37 [stripline]: J7.SIG U45.5
N$38: R5.2 S3.1
N$40: Q2.2 Q6.3
N$41: U2.3 U3.1
N$42: U3.3 U4.1
N$43 [stripline]: J3.CLK U45.1X6
N$44: R6.2 S4.1
N$45: C35.1 R10.1
N$46: C35.2 U46.6
N$47 [stripline]: J8.SIG U46.5
N$48 [stripline]: J4.CLK U46.1X6
N$49: U4.3 U5.1
N$50: D3.A Q3.3 U45.7
N$51: U6.3 U7.1
N$52: U7.3 U8.1
N$53: U8.3 U9.1
N$54: R1.2 U1.1
N$55: R1.1 U10.4
N$56: U5.3 U6.1
N$57: R2.2 U10.5
N$58: U14.3 U15.1
N$59: D4.A Q4.3 U46.7
N$60: Q4.2 Q8.3
N$61: Q9.S U49.VIN
N$62: U32.3 U33.1
N$63: U33.3 U34.1
N$64: U34.3 U35.1
N$65: U35.3 U36.1
N$67: U37.3 U38.1
N$68: U38.3 U39.1
N$69: U39.3 U40.1
N$70: U40.3 U41.1
N$71: U41.3 U42.1
N$72: U18.3 U19.1
N$73: U19.3 U20.1
N$74: U20.3 U21.1
N$75: U21.3 U22.1
N$76: U22.3 U23.1
N$77: U23.3 U24.1
N$78: U24.3 U25.1
N$79: U25.3 U26.1
N$80: U26.3 U27.1
N$81: U27.3 U28.1
N$82: U28.3 U29.1
N$83: U29.3 U30.1
N$84: U30.3 U31.1
N$85: C43.1 R45.1 U48.5
N$145: R20.1 U47.C4
NEOPIXEL_DIN: J30.1 U10.3
RELAY_AND_0: Q5.1 R11.2 U50.8
RELAY_AND_1: Q6.1 R13.2 U50.6
RELAY_AND_2: Q7.1 R15.2 U50.4
RELAY_AND_3: Q8.1 R17.2 U50.20
RELAY_MECH_0: C28.2 Q1.1 R3.2 R12.2 U50.9
RELAY_MECH_1: C29.2 Q2.1 R4.1 R14.2 U50.7
RELAY_MECH_2: C30.2 Q3.1 R5.1 R16.2 U50.5
RELAY_MECH_3: C31.2 Q4.1 R6.1 R18.2 U50.19

## Tracks (layer width: path | path; a pad name or v marks a point on that pad's centre or on a via)
!TCA_INT
  GND1 0.2: U50.1 436.5,74.63 R22.2
+3V3  (via drill 0.3, 0.5)
  GND1 0.2: R22.1 435.1,75.03 v435.1,76.4 | U50.24 440.43,73.47 439.9,74 439.9,74.87 C42.2 | R24.1 445.9,74.03 v445.9,76.4 | R23.1 v449.8,73.72 | U51.4 457.62,118.53 v457.6,118.5 | D18.2 445.8,130.25 v445.8,131.1 | v445.8,123.2 445.8,122.35 D23.2 | D25.2 445.8,118.35 445.85,118.3 v446.9,118.3 | v437.8,119.25 437.8,118.2 437.9,118.2 D34.2 | v437.8,123.2 437.8,122.35 D32.2 | D29.2 437.8,126.35 437.25,126.9 v436.8,126.9 | v437.8,129.6 437.8,130.35 D27.2 | v474.9,122 475.55,122 arc90 D28.2 | v471.3,121.9 471.85,121.9 arc90 D26.2 | v467.7,121.7 468.05,121.7 arc90 D24.2 | v464.1,121.8 464.5,121.8 arc90 464.9,122.2 464.9,122.15 arc-90 D22.2 | v460.5,121.8 461.1,121.8 arc90 461.4,122.1 D19.2 | v456.9,121.8 457.35,121.8 arc90 D17.2 | TP1.TP 444.2,103.6 C37.2 | D31.2 479.25,121.05 v479.2,121 | D33.2 482.85,121.05 v482.9,121 | D30.8 v423.9,127.4 | U10.1 451.5,111.4 v451.6,111.3 C1.1 | R2.1 453.33,107.77 v453.4,107.7 | v447,126.34 D20.2 | D21.8 v427.9,126.9
  GND1 0.3: U51.16 465.96,120.47 C44.1 | C44.1 C45.1 467.63,120.2 v468.4,120.2 | C44.1 466.3,120.33 | C48.1 v466.8,107.7 C49.1 465.95,108.27 465.48,108.75 U53.1 | 461,108.5 C47.1 | 461,108.5 v461,108 C46.1 | U52.1 460.68,108.5 461,108.5
  GND1 0.5: C37.2 444.1,103.2 | C42.2 440.9,75.87 v440.9,76.4
  GND1 0.508: U47.E1 U47.D1
  LowSpeed 0.2: 435.1,76.45 v435.1,76.4
  LowSpeed 1: 439.1,76.4 v435.1,76.4 | v449.8,73.72 447.12,76.4 v445.9,76.4 v440.9,76.4 439.1,76.4 | 439.1,76.4 439.4,76.7 439.4,90.3
  other vias: 443.7,101.2 444.6,101.2 443.7,102
  pour GND1 (rank 2, no thermals): 443.2,103.7 443.2,99.7 445.2,99.7 445.2,103.7
  pour LowSpeed (rank 3): 368,120 368,132.4 366.6,133.7 366.6,136.8 368,138.2 368,148.1 493,148.1 493,89 437,89 435,91 435,104 419,120
+5V0  (via drill 0.3, 0.35, 0.5, 1)
  GND1 0.2: C3.2 470.99,90.72 U1.2 | 320.1,23.1 U43.1 319.82,22.82 | D1.C 316.16,22 v316.18,22.02 | 320.1,48.1 U44.1 | 314.1,71.9 D3.C v315.7,72 | 320.21,72.79 U45.1 | 314.06,96.94 D4.C 314.2,97.2 v315.9,97.2 | D2.C 314.7,47.7 v315.8,47.7 | U10.6 450.85,109.45 v451.5,110.1 452.07,110.1 C2.1
  GND1 0.4: v483.08,119.1 481.74,119.1 | 481.74,119.1 C41.1 | U48.1 480.3,119.5 480.7,119.1 481.74,119.1 | v477.6,120.8 477.6,119.55 U48.3
  GND1 0.406: C19.2 82.44,30.48 v81.5,30.48 | C20.2 42.44,30.48 v41.5,30.48
  GND1 0.5: 448.3,103.2 C36.2 448.6,103.3 | C21.2 352.9,105.4 v353,105.5 | U24.2 344.48,97.53 v344.5,97.5 | U25.2 344.48,101.53 v344.5,101.5 | U26.2 344.48,105.53 v344.5,105.5 | U19.2 344.48,77.53 v344.5,77.5 C9.2 | U11.2 348.48,106.47 348,106 v348,105.5 | U9.2 357.5,105.53 v357.5,105.5 | U17.2 348,82.47 v348,82.5 | C7.2 v348,79 348.52,78.47 U18.2 | U8.2 357.5,101.53 v357.5,101.5 | U7.2 357.5,97.53 v357.5,97.5 | U6.2 357.5,93.53 v357.5,93.5 C5.2 | U5.2 357.5,89.53 v357.5,89.5 | U4.2 v357.5,84.5 | U3.2 357.48,81.53 v357.5,81.5 | U2.2 357.48,77.53 v357.5,77.5 C4.2 | U27.2 310,115.5 v309.17,115.5 C14.2 | C13.2 308.36,90.47 v309.2,90.47 U28.2 | U29.2 v309.2,65.47 309.18,65.5 C11.2 | U30.2 v309.2,40.48 309.18,40.5 C12.2 | v41.5,30.48 U36.2 | v81.5,30.48 U35.2 | U34.2 v121.5,30.48 121.53,30.5 C18.2 | U33.2 v161.5,30.48 162.44,30.48 C17.2 | U32.2 v201.5,30.48 202.44,30.48 C16.2 | U31.2 v241.5,30.48 242.44,30.48 C15.2 | C22.2 v41,128.5 41,129 U37.2 | C23.2 v81.5,129.5 80.5,129.5 U38.2 | C24.2 v121.5,129.5 120.5,129.5 U39.2 | C25.2 v161.5,129.5 160.5,129.5 arc-90 U40.2 | C26.2 v201.5,129.5 200.5,129.5 U41.2 | C8.2 11.6,78.6 v10,77 | U42.2 241.5,129.53 | 241.5,129.53 242.44,129.53 C27.2 | 241.5,129.53 v241.5,129.5 | v344.5,84.8 344.2,84.8 U21.2 | v344.5,81.5 343.5,81.5 U20.2 | v344.5,89.5 343.5,89.5 U22.2 | U23.2 344.48,93.53 v344.5,93.5 C10.2 | U15.2 348.02,90.47 v348,90.5 | U16.2 348.52,86.47 v348,87 | U14.2 348.02,94.47 v348,94.5 347.53,94.5 C6.2 | U13.2 348.02,98.47 v348,98.5 | U12.2 348.02,102.47 v348,102.5 | C3.2 471.4,91.2 v471,91.6 | U46.1 320,97.7 319.5,97.2 v318.5,97.2 | U45.1 320,72.7 v318.8,72.7 | U44.1 319.2,48 v318.9,47.7 | v318.9,22.5 320,22.5 U43.1
  GND1 0.5: v446,109.9 TP2.TP
  GND1 0.508: U47.B1 U47.A1
  GND1 0.8: Q9.D 451,105.3 450.3,104.6 450.3,104 449.6,103.3 C36.2
  HighSpeed 0.5: 240,25 240,29.5 240.97,30.48 v241.5,30.48 | v201.5,30.48 201.5,30.5 201,30.5 200,29.5 200,25 | 160,25 160,29.5 161,30.5 161.5,30.5 v161.5,30.48 | 120,25 120,29.5 121,30.5 121.5,30.5 v121.5,30.48 | v81.5,30.48 81.47,30.5 81,30.5 80,29.5 80,25 | 40,25 40,29.5 41,30.5 41.48,30.5 v41.5,30.48 | 41,129.5 v41,128.5 41,129.65 | v81.5,129.5 81,129.5 80,130.5 80,135 | v121.5,129.5 121,129.5 120,130.5 120,135 | v161.5,129.5 161,129.5 160,130.5 160,135 | v201.5,129.5 201,129.5 200,130.5 200,135 | v357.5,105.5 v357.5,101.5 v357.5,97.5 v357.5,93.5 v357.5,89.5 v357.5,84.5 v357.5,81.5 v357.5,77.5 | v344.5,105.5 v344.5,101.5 v344.5,97.5 v344.5,93.5 v344.5,89.5 v344.5,84.8 v344.5,81.5 v344.5,77.5 | v348,105.5 v348,102.5 v348,98.5 v348,94.5 v348,90.5 v348,87 v348,82.5 v348,79 | 447.78,103.21 447.7,103.13 | 447.7,103.97 arc90 447.78,104.05 447.78,106.32 447.1,107 447.1,108.7 447.3,108.9 | 447.3,108.9 448,109.6 451,109.6 v451.5,110.1 | 447.3,108.9 447,108.9 v446,109.9
  HighSpeed 1: v435.8,105.5 438.4,105.5 439.93,103.97 447.7,103.97 447.7,103.13 v447.7,101.1 | v241.5,129.5 239.4,131.6 222.3,131.6 216.8,126.1 205.6,126.1 203.9,127.8 203.9,131.1 200,135
  HighSpeed 2: v285,25 240,25 200,25 160,25 120,25 80,25 40,25 26.5,25 10,41.5 v10,77 10,120.5 19.15,129.65 41,129.65 44.65,129.65 50,135 80,135 120,135 160,135 200,135
  LowSpeed 0.2: v315.7,72 315.7,72.7
  LowSpeed 0.4: v483.08,119.1 478.1,119.1 477.6,119.6 v477.6,120.8
  LowSpeed 0.5: v471,91.6 470.63,91.97 470.63,101.17 | v309.2,40.48 312.57,40.48 315,42.9 319.3,42.9 320,42.2 S1.3 320,37.8 317.4,35.2 317.4,33.8 313.7,30.1 313.7,24.5 v316.18,22.02 316.66,22.5 v318.9,22.5 | v309.2,65.47 312.38,65.47 315.4,68.5 319.2,68.5 320,67.7 S2.3 320,62.2 314,56.2 314,48.6 314.9,47.7 v315.8,47.7 v318.9,47.7 | v309.2,90.47 312.07,90.47 315.2,93.6 318.9,93.6 320,92.5 S3.3 320,87.4 314,81.4 314,74.4 315.7,72.7 v318.8,72.7 | 319.1,97.2 v318.5,97.2 v315.9,97.2 314,99.1 314,109.8 315.1,110.89
  LowSpeed 0.8: v448.6,101.9 452.5,101.9 453.23,101.17 470.63,101.17 472.2,101.17 472.28,101.25 480.25,101.25 483.73,104.73 483.73,118.47 483.1,119.1 v483.08,119.1
  LowSpeed 1: v435.8,105.5 v357.5,105.5 v353,105.5 v348,105.5 v344.5,105.5 343.83,105.5 338.53,110.8 320,110.8 | v285,25 303.5,25 309.17,30.67 309.17,36.34 309.2,36.37 v309.2,40.48 v309.2,65.47 v309.2,90.47 309.17,90.5 v309.17,115.5 310.5,115.5 315.1,110.89 315.2,110.8 320,110.8 | S4.3 320,110.8
  other vias: 448.6,101.1
  pour GND1 (rank 2, no thermals): 447.2,99.7 447.2,103.7 449.2,103.7 449.2,99.7
+5V0_GOOD  (via drill 0.3)
  GND1 0.2: v447.99,95.91 U47.B4 | Q9.G 451.3,103.25 v451.3,104.1 | R25.1 451.33,97.5 v452,97.5
  HighSpeed 0.2: v451.3,104.1 451.3,100.4 452.8,98.9 452.8,97.5 | 452.8,97.5 452.8,93.6 452.4,93.2 448.6,93.2 447.99,93.81 v447.99,95.91 | v452,97.5 452.8,97.5
+12V  (via drill 0.3, 0.35)
  GND1 0.2: R25.2 450.3,97.73 v450.3,99.1
  LowSpeed 0.2: v450.3,99.1 450.3,98.4 450.2,98.4
  LowSpeed 0.5: TP7.1 459.15,96.25 457,98.4
  LowSpeed 1: 471.8,88.7 v471.8,88.6 | v444.5,98.4 450.2,98.4 457,98.4 465.7,89.7 472.1,89.7 472.8,89 v472.8,88.6 472.8,71.8 473.3,71.3 v473.6,71.3
  other vias: 471.7,71.3 444.3,99.2 442.9,99.3 447.7,98.4 448.1,99.1 441,100.2 441,99.3 447,98.3 472.7,71.3 473.6,88.6
  pour GND1 (isolate 0.1, no thermals): 471.3,72.1 471.3,71 474.3,71 474.3,72.1
  pour LowSpeed (rank 2, no thermals): 471.3,72.1 471.3,70.8 474.3,70.8 474.3,72.1
  pour GND1 (no thermals): 471.5,89 471.5,87.9 474,87.9 474,89
  pour LowSpeed (no thermals): 471.5,89.2 471.5,87.9 474,87.9 474,89.2
  pour GND1 (no thermals): 440.8,98.9 443.4,98.9 444.8,97.5 445.6,97.5 445.6,99.6 443.1,99.6 442.3,100.4 442.3,100.5 440.8,100.5
  pour GND1 (no thermals): 446.8,97.5 446.8,99.5 449.3,99.5 449.3,98.7 449,98.7 447.8,97.5
  pour LowSpeed (no thermals): 440.8,98.9 443.4,98.9 444.8,97.5 449.3,97.5 449.3,99.6 443.1,99.6 442.3,100.4 442.3,100.5 440.8,100.5
AGND  (via drill 0.3, 0.5)
  GND1 0.48: 470.2,87.34 470.47,87.34 470.51,87.3 J32.14
  GND1 0.5: J32.13 v470.6,72.7 | v468.8,79.1
  LowSpeed 0.5: v470.6,72.7 468.8,74.5 v468.8,79.1
  other vias: 21,105 60,61.5 100,61.5 140,61.5 180,61.5 268,60 210,48 130,48 50,48 60,98.5 21,114 403,118 393,118 383,118 373,118 408.3,109.7 401.3,109.7 391.3,109.7 381.3,109.7 371.3,109.7 361.3,109.7 354.3,109.7 349.3,114.7 345.3,118.7 364,121.5 363.7,131.8 344.1,119.9 347.9,116 352.2,111.3 321.2,129.1 340.5,121.4 329.6,120.7 311.2,126.7 306.5,121.3 299,120 284,110 284,98 284,86 284,76 284,67 284,59 284,49 283,139 328.4,143.94 337,144.02 352,144.03 325.6,124.6 314.6,129.2 317,120.5 331,123.4 363.3,143.9 363.9,127.2 363.4,138.8 324.1,120.5 334.6,121.4 312.7,122.1 316.2,125.3 412.8,109.8 416.1,107.9 419.2,104.6 421.9,102.1 423.3,100.4 423.4,96.5 423.4,92.8 423.4,88.8 425.3,86.3 428.1,83.3 431.1,80.3 433,79.2 436.6,79.3 441.3,79.3 446.9,79.4 452.5,79.4 458.4,79.4 464.4,79.5 468.5,87.7 463.5,87.7 456.3,87.8 449,87.7 443.1,87.7 437.3,87.7 433.4,91.5 433.3,96.9 433.2,100.2 431.8,104.4 429,107.4 425.5,110.7 422,114.4 417.7,118.3 411.5,118.2 366.5,118.5 21,95 21,85 21,75 21,65 21,55 21,46 30,46 40,46 50,46 60,46 30,114 40,114 50,114 60,114 70,114 80,114 90,114 100,114 110,114 120,114 130,114 140,114 150,114 160,114 170,114 180,114 190,114 200,114 210,114 220,114 230,114 240,114 250,114 260,117 267,124 70,46 80,46 90,46 100,46 110,46 120,46 130,46 140,46 150,46 160,46 170,46 180,46 190,46 200,46 210,46 220,46 230,46 240,46 250,46 260,46 270,46 280,46 273,130 287.4,142 376.3,109.7 386.3,109.7 396.3,109.7 366.3,109.7 358.3,109.7 364.3,118.7 378.5,118.5 388.5,118.5 398.5,118.5 407.5,118.5 414.5,118.5 420,116.4 424,112.4 427,109.4 433,103.4 433.4,93.5 433.4,95.5 453,87.7 460,87.7 446,87.7 441.1,87.7 444.3,79.3 449.3,79.3 455.5,79.4 461.4,79.4 405.3,109.7 278,135 220,61.5 100,98.5 138,100.5 178,100.5 218,100.5 260,98.5 270,110 292.9,143.9 265.3,91.2 245.4,80.6 218.4,87.5 193.8,80.8 171.4,88.2 130.7,92 96.8,83.3 62.9,90.8 28.6,89.8 27.9,68.5 336.6,130.2 341.5,130.3 353.9,130.4 360.6,123.9 358,129.5 357.4,126.1 329.7,129.5 332.1,129.7 302.1,143.1 307.7,143.5 314.85,143.55 321.6,143.8 361.1,130 360.7,126.7
  pour GND1 (rank 2): 20,115 286,115 286,45 20,45
  pour GND1: 365,119 291,119 285,113 256,114 283,141 283,148 365,148
  pour LowSpeed: 20,115 286,115 286,45 20,45
  pour GND2: 365,119 418,119 434,103 434,90.8 436.8,88 474.2,88 474.2,79.5 471.3,79.5 471.3,79 431.6,79 423,87.6 423,100 414,109 353.3,109 331.6,130.7 331.6,135 365,135
  pour LowSpeed: 343.2,119 291,119 285,113 256,114 283,141 283,148 365,148 365,119 358.8,119 351,111.2
  pour GND1 (isolate 0.1, rank 2): 365,119 418,119 434,103 434,90.8 436.8,88 474.2,88 474.2,79.5 471.3,79.5 471.3,79 431.6,79 423,87.6 423,100 414,109 353.3,109 343,119 343,121 333,131 331.6,134.9 365,135
AIO_0  (via drill 0.3, 0.5)  (1 unrouted)
  GND1 0.2: J32.20 470.72,79.68 v470.7,79.7
  GND1 0.5: v58,105 60,105 D5.C
  HighSpeed 0.2: v470.7,79.7 466,79.7 465.55,80.15 432.85,80.15 424,89 424,101 414.49,110.52 355.38,110.52 343.1,122.8 335.28,122.8 J17.3
  GND2 0.2: J26.2 287.98,139.72 294.6,139.72 294.88,139.44 299.24,139.44 300.3,140.5 303.7,140.5 304.8,141.6 313.9,141.6 315.4,143.1 320.06,143.1 J17.19
  GND2 0.5: 58.3,105 v58,105 | J9.1 v58,105 | v58,105 65,112 257,112 281.37,136.37 J26.2
AIO_1  (via drill 0.3, 0.5)  (1 unrouted)
  GND1 0.2: J32.7 470.22,80.32 v470.2,80.3
  GND1 0.5: D6.C 100,105 v98,105
  HighSpeed 0.2: v470.2,80.3 466.4,80.3 466,80.7 433.3,80.7 424.7,89.3 424.7,101.3 414.85,111.15 355.97,111.15 343.12,124 336.62,124 J17.4 | J26.4 289.9,139.1 299.5,139.1 300.5,140.1 303.9,140.1 304.9,141.1 314,141.1 315.3,142.4 323.3,142.4 J17.20
  GND2 0.2: J26.4 285.9,135.1 283.9,135.1
  GND2 0.5: J10.1 v98,105 105,98 245.5,98 282.6,135.1 283.9,135.1
AIO_2  (via drill 0.3, 0.5)  (1 unrouted)
  GND1 0.2: J32.19 470.75,80.95 v470.7,80.9
  GND1 0.5: v138,105 140,105 D7.C
  HighSpeed 0.2: v470.7,80.9 466.8,80.9 466.3,81.4 433.6,81.4 425.5,89.5 425.5,101.5 415.21,111.78 356.43,111.78 343.22,125 338.16,125 J17.5
  HighSpeed 0.5: J11.1 v138,105 v148,95
  GND2 0.2: 288.4,133 288.4,135.06 J26.6 292.17,138.83 299.83,138.83 300.7,139.7 304,139.7 305,140.7 314.2,140.7 315.4,141.9 318.6,141.9 319.45,141.05 319.45,139.35 319.9,138.9 326.98,138.9 J17.21
  GND2 0.5: v148,95 245,95 282.25,132.25 287.95,132.25 288.4,132.7 288.4,133
AIO_3  (via drill 0.3, 0.5)  (1 unrouted)
  GND1 0.2: J32.6 470.21,81.59 v470.2,81.6
  GND1 0.5: v178,105 180,105 D8.C
  HighSpeed 0.2: v470.2,81.6 466.9,81.6 466.45,82.05 433.95,82.05 426.3,89.7 426.3,101.7 415.58,112.42 357.1,112.42 343.52,126 339.7,126 J17.6 | J26.8 294.34,138.46 300,138.46 300.84,139.3 304.2,139.3 305.2,140.3 314.6,140.3 315.6,141.3 318.5,141.3 319.1,140.7 319.1,139.2 319.7,138.6 329.22,138.6 J17.22
  HighSpeed 0.5: J12.1 v178,105 v191,92
  GND2 0.2: J26.8 291,135.12 291,133
  GND2 0.5: v191,92 244.5,92 283.7,131.2 289.2,131.2 291,133
AIO_4  (via drill 0.3, 0.5)  (1 unrouted)
  GND1 0.2: J32.18 470.72,82.22 v470.7,82.2
  GND1 0.5: v218,105 220,105 D9.C
  HighSpeed 0.2: v470.7,82.2 467.3,82.2 466.9,82.6 434.3,82.6 427.1,89.8 427.1,101.9 415.94,113.06 357.66,113.06 343.66,127.06 341.18,127.06 J17.7
  HighSpeed 0.5: J13.1 v218,105 v234,89
  GND2 0.2: 293.5,133 293.5,135.08 J26.10 296.51,138.09 300.23,138.09 301.07,138.93 304.63,138.93 305.6,139.9 314.4,139.9 316,138.3 331.46,138.3 J17.23
  GND2 0.5: v234,89 244,89 285,130 291.6,130 293.5,131.9 293.5,133
AIO_5  (via drill 0.3, 0.5)  (1 unrouted)
  GND1 0.2: J32.5 470.26,82.86 v470.2,82.8
  GND1 0.5: D10.C 260.5,105 v262,105
  HighSpeed 0.2: v470.2,82.8 467.6,82.8 467.1,83.3 434.6,83.3 427.8,90.1 427.8,102.1 416.29,113.61 358.29,113.61 344,127.9 342.88,127.9 J17.8 | 296.1,133 296.1,135.14 J26.12 298.68,137.72 300.35,137.72 301.17,138.53 304.94,138.53 305.9,139.5 314.3,139.5 315.8,138 333.7,138 J17.24
  HighSpeed 0.5: J14.1 v262,105 286.25,129.25 294.25,129.25 296.1,131.1 296.1,133
AIO_6  (via drill 0.3, 0.5)  (1 unrouted)
  GND1 0.2: J32.17 v470.71,83.49 v470.7,83.5
  GND1 0.5: v58,55 60,55 D11.C
  HighSpeed 0.2: v470.7,83.5 467.9,83.5 467.4,84 434.9,84 428.5,90.4 428.5,102.3 416.48,114.33 359,114.33 J17.9
  GND2 0.2: 298.6,133 298.6,135.1 J26.14 301.7,138.2 305.2,138.2 306.1,139.1 314.1,139.1 315.5,137.7 335.94,137.7 J17.25
  GND2 0.5: J20.1 v58,55 78,75 268.5,75 272,78.5 272,113.5 287,128.5 296.1,128.5 298.6,131 298.6,133
AIO_7  (via drill 0.3, 0.5)  (1 unrouted)
  GND1 0.2: J32.4 470.23,84.13 v470.2,84.1
  GND1 0.5: v98,55 100,55 D12.C
  HighSpeed 0.2: v470.2,84.1 468.3,84.1 467.7,84.7 435.3,84.7 429.2,90.8 429.2,102.5 416.65,115.05 359.5,115.05 340.86,133.69 J17.10 | J26.16 303.92,137.88 305.58,137.88 306.4,138.7 313.9,138.7 315.2,137.4 338.18,137.4 J17.26
  GND2 0.2: J26.16 301.2,135.16 301.2,133
  GND2 0.5: J21.1 v98,55 115,72 269,72 274,77 274,113 288,127 298.1,127 301.2,130.1 301.2,133
AIO_8  (via drill 0.3, 0.5)  (1 unrouted)
  GND1 0.2: J32.16 470.74,84.76 v470.7,84.8
  GND1 0.5: v138,55 140,55 D13.C
  HighSpeed 0.2: v470.7,84.8 468.8,84.8 468.3,85.3 435.8,85.3 429.9,91.2 429.9,102.7 417,115.59 360.5,115.59 343.4,132.69 J17.11
  GND2 0.2: 303.7,133 303.7,135.12 J26.18 306.88,138.3 313.7,138.3 314.9,137.1 340.42,137.1 J17.27
  GND2 0.5: J22.1 v138,55 152,69 270,69 276,75 276,112.5 289,125.5 299.6,125.5 303.7,129.6 303.7,133
AIO_9  (via drill 0.3, 0.5)  (1 unrouted)
  GND1 0.2: J32.3 v470.2,85.4
  GND1 0.5: v178,55 180,55 D14.C
  HighSpeed 0.2: v470.2,85.4 469.3,85.4 468.7,86 436,86 430.8,91.2 430.8,102.7 417.27,116.23 361.5,116.23 345.94,131.79 J17.12 | J26.20 309.01,137.89 313.51,137.89 314.6,136.8 342.66,136.8 J17.28
  GND2 0.2: J26.20 306.3,135.18 306.3,133
  GND2 0.5: J23.1 v178,55 189,66 271,66 278,73 278,112 290,124 300.6,124 306.3,129.7 306.3,133
AIO_10  (via drill 0.3, 0.5)  (1 unrouted)
  GND1 0.2: J32.15 470.77,86.03 v470.7,86.1
  GND1 0.5: v218,55 220,55 D15.C
  HighSpeed 0.2: v470.7,86.1 469.6,86.1 469.1,86.6 436.3,86.6 431.6,91.3 431.6,102.8 417.54,116.86 362.5,116.86 348.48,130.88 J17.13
  GND2 0.2: 308.8,133 308.8,135.14 J26.22 311.16,137.5 313.2,137.5 314.2,136.5 344.9,136.5 J17.29
  GND2 0.5: J24.1 v218,55 226,63 272,63 280,71 280,111.5 291,122.5 301.6,122.5 308.8,129.7 308.8,133
AIO_11  (via drill 0.3, 0.5)  (1 unrouted)
  GND1 0.2: J32.2 470.23,86.67 v470.2,86.7
  GND1 0.5: v268,55 270,55 D16.C
  HighSpeed 0.2: v470.2,86.7 469.7,87.2 436.5,87.2 432.4,91.3 432.4,103 417.9,117.5 363.5,117.5 351.02,129.98 J17.14 349.82,136.2 312.74,136.2 J26.24
  GND2 0.2: J26.24 311.3,135.1 311.3,133.2
  GND2 0.5: J25.1 v268,55 270,55 282,67 282,111 292,121 302.6,121 311.3,129.7 311.3,133.2
BUTTON0  (via drill 0.3)
  GND1 0.2: U50.16 440.43,68.28 v440.4,68.3
  HighSpeed 0.2: v440.4,68.3 439.7,68.3 437.41,70.59 432.01,70.59 417.8,84.8 376.9,84.8 374.46,87.24 S5.SW1
BUTTON1  (via drill 0.3)
  GND1 0.2: U50.17 440.82,68.92 v440.8,68.9
  HighSpeed 0.2: v440.8,68.9 439.8,68.9 437.2,71.5 432.1,71.5 418.1,85.5 396.9,85.5 394.46,87.94 S7.SW1
BUTTON2  (via drill 0.3)
  GND1 0.2: U50.18 440.52,69.58 v440.5,69.6
  HighSpeed 0.2: v440.5,69.6 440,69.6 436.7,72.9 431.9,72.9 418.6,86.2 416.4,86.2 414.46,88.14 S9.SW1
BUTTON3  (via drill 0.3)
  GND1 0.2: v435.1,66.38 435.72,67 436.6,67 436.57,66.97 U50.11
  HighSpeed 0.2: S6.SW1 374.46,69.64 375.85,68.25 427.75,68.25 429.61,66.39 v435.1,66.39 v435.1,66.38
BUTTON4  (via drill 0.3)
  GND1 0.2: U50.14 440.82,66.97 v440.8,67
  HighSpeed 0.2: S8.SW1 394.46,69.94 395.2,69.2 428.1,69.2 430.3,67 v440.8,67
BUTTON5  (via drill 0.3)
  GND1 0.2: U50.10 433.37,67.62 v433,68
  HighSpeed 0.2: S10.SW1 414.87,72.6 427.1,72.6 431.7,68 v433,68
DIN0  (via drill 0.3)  (1 unrouted)
  GND1 0.2: R43.2 v430.7,117.4 | D30.4 v424.4,121.1
  HighSpeed 0.2: v430.7,117.4 428.1,117.4 v424.4,121.1 423.1,122.4 405.89,122.4 J35.2 | J35.11 390.47,142.9 384.7,142.9 380.8,139 370.19,139 J34.2
DIN0_P  (via drill 0.3)
  GND1 0.2: R43.1 D34.3 v435.7,116.5
  HighSpeed 0.2: U49.14 446.32,113.68 445.1,114.9 437.3,114.9 v435.7,116.5
DIN1  (via drill 0.3)
  GND1 0.2: v439.2,118.4 439.86,117.74 R35.2 | D30.3 v423.9,122.8
  HighSpeed 0.2: J35.12 J35.3 406.93,123.9 423.6,123.9 423.95,123.55 | v439.2,118.4 429.1,118.4 423.95,123.55 | v423.9,122.8 423.9,123.5 423.95,123.55
  LowSpeed 0.2: J35.12 395.83,141.52 394.84,142.51 379.9,142.51 376.8,139.41 373.13,139.41 J34.4
DIN1_P  (via drill 0.3)
  GND1 0.2: R35.1 D25.3 v444.8,117.4
  HighSpeed 0.2: v444.8,117.4 448.31,117.4 U49.15
DIN2  (via drill 0.3)  (1 unrouted)
  GND1 0.2: R41.2 v430.7,121.4 | D30.2 v423.4,125.2
  HighSpeed 0.2: v430.7,121.4 428.4,121.4 424.6,125.2 v423.4,125.2 408.17,125.2 J35.4
  LowSpeed 0.2: J35.4 394.55,138.82 394.55,140.9 393.81,141.64 380,141.64 376.86,138.5 374.8,138.5 372.67,136.37 J34.6
DIN2_P  (via drill 0.3)
  GND1 0.2: D32.3 R41.1 | 435.8,121.4 D32.3 | v435.7,120.4 D32.3
  HighSpeed 0.2: U49.16 449.12,119.12 443.18,119.12 441.6,120.7 436.4,120.7 436.1,120.4 v435.7,120.4
DIN3  (via drill 0.3)  (1 unrouted)
  GND1 0.2: v439.2,122.4 439.86,121.74 R33.2 | D30.1 v422.9,126.58
  HighSpeed 0.2: v439.2,122.4 429.28,122.4 425.1,126.58 v422.9,126.58 409.33,126.58 J35.5
  LowSpeed 0.2: J35.5 399.71,133.8 394.95,133.8 394.55,134.2 394.55,135.8 391.71,138.64 390.29,138.64 388.11,140.82 380.5,140.82 377.43,137.75 376.56,137.75 J34.8
DIN3_P  (via drill 0.3)
  GND1 0.2: R33.1 D23.3 v444.8,121.4
  HighSpeed 0.2: v444.8,121.4 452.13,121.4 453.83,123.1 455.5,123.1 459.65,127.25 U49.9
DIN4  (via drill 0.3)  (1 unrouted)
  GND1 0.2: R39.2 v430.7,125.4 | D30.10 v422.9,127.4
  HighSpeed 0.2: 422.9,127.95 410.5,127.95 J35.6 | 422.9,127.95 425.65,127.95 428.2,125.4 v430.7,125.4 | v422.9,127.4 422.9,127.95
  LowSpeed 0.2: J35.6 401.55,133.1 390.1,133.1 388.6,134.6 388.6,137.6 386.3,139.9 381.25,139.9 J34.10
DIN4_P  (via drill 0.3)
  GND1 0.2: R39.1 D29.3 v435.7,124.6
  HighSpeed 0.2: U49.10 451.99,123.8 436.5,123.8 v435.7,124.6
DIN5  (via drill 0.3)  (1 unrouted)
  GND1 0.2: v439.2,126.4 439.86,125.74 R31.2 | D30.9 v423.4,129.7
  HighSpeed 0.2: 423.4,129.32 411.67,129.32 J35.7 | 423.4,129.32 426.28,129.32 429.2,126.4 v439.2,126.4 | v423.4,129.7 423.4,129.32
  LowSpeed 0.2: J35.7 403.29,132.3 388.75,132.3 387.48,133.57 387.48,136.93 385.52,138.88 382.77,138.88 J34.12
DIN5_P  (via drill 0.3)
  GND1 0.2: R31.1 D20.3 v444.8,125.4
  HighSpeed 0.2: v444.8,125.4 451.05,125.4 U49.11
DIN6  (via drill 0.3)  (1 unrouted)
  GND1 0.2: R37.2 v430.8,129.4 | D30.7 v424.4,130.79
  HighSpeed 0.2: v430.8,129.4 428.2,129.4 426.81,130.79 v424.4,130.79 412.74,130.79 J35.8
  LowSpeed 0.2: J35.8 404.83,131.3 388.45,131.3 386.6,133.15 386.6,137 385.6,138 384.43,138 J34.14
DIN6_P  (via drill 0.3)
  GND1 0.2: R37.1 D27.3 v435.7,128.6
  HighSpeed 0.2: U49.12 450.56,127.44 444.75,127.44 444.3,127.9 436.4,127.9 v435.7,128.6
DIN7  (via drill 0.3)  (1 unrouted)
  GND1 0.2: R29.2 439.86,130.34 v439.5,130.7 | D30.6 v424.9,131.8
  HighSpeed 0.2: J35.9 414.27,131.8 v424.9,131.8 429.5,131.8 429.51,131.81 438.39,131.81 v439.5,130.7
  LowSpeed 0.2: J35.9 406.28,130.21 386.4,130.21 384.15,132.46 384.15,135.19 J34.16
DIN7_P  (via drill 0.3)
  GND1 0.2: R29.1 D18.3 v444.8,129.4
  HighSpeed 0.2: v444.8,129.4 449.01,129.4 U49.13
DOUT0  (via drill 0.3)  (1 unrouted)
  GND1 0.2: R28.2 453.8,126.3 453.8,125.8 v453.1,125.8 | D21.10 v426.9,129.5
  HighSpeed 0.2: v453.1,130.4 448.5,135 J33.2
  LowSpeed 0.2: v453.1,125.8 v453.1,130.4 | J33.11 447.02,141.4 434.7,141.4 431.8,138.5 424.74,138.5 J31.2 421.3,135.06 421.3,132.8 423.9,130.2 426.2,130.2 v426.9,129.5
DOUT0_P
  GND1 0.2: D17.3 456.7,124.5 456,125.2 456,126.3 R28.1 455.94,127.24 456.5,127.8 460.1,127.8 461.22,128.92 U49.8
DOUT1  (via drill 0.3)  (1 unrouted)
  GND1 0.2: R30.2 457.6,126.3 v458.2,126.9 | D21.9 427.4,127.5 v427.3,127.4
  HighSpeed 0.2: J33.3 455.38,130.5 457.5,130.5 458.2,129.8 v458.2,126.9 | J31.4 427.98,139.2 v428,139.2
  LowSpeed 0.2: 458.3,127 v458.2,126.9 | J33.12 447.96,143 434.7,143 430.9,139.2 v428,139.2 | v427.3,127.4 427.7,127.8 427.7,129.8 425,132.5 424.6,132.5 423.9,133.2 423.9,135.12 J31.4
DOUT1_P
  GND1 0.2: 464.3,128.49 U49.7 464.12,128.92 462.7,127.5 460.4,127.5 460.2,127.3 459.7,127.3 459.54,127.14 R30.1 459.54,125.26 460.3,124.5 D19.3
DOUT2  (via drill 0.3)  (1 unrouted)
  GND1 0.2: v461.9,126.4 461.16,126.4 R32.2 | D21.7 v428.4,129.9
  HighSpeed 0.2: v461.9,126.4 461.1,127.2 461.1,129.5 459.4,131.2 457.22,131.2 J33.4 | J33.13 451.7,141.8 434.2,141.8 430.29,137.89 429.21,137.89 J31.6
  LowSpeed 0.2: J31.6 426.46,135.14 426.46,133.15 428.4,131.21 v428.4,129.9
DOUT2_P